# Altium PCB ControlBoard.PcbDoc (part 1 of 2)
Units mil, origin at the board's own origin, x right, y up, seen from the top; angles counter-clockwise.
Board outline 4736.14 x 4742.83 mil, 2 copper layers (Top Layer, Bottom Layer); 196 components, 148 nets, 699 pads, 226 vias.
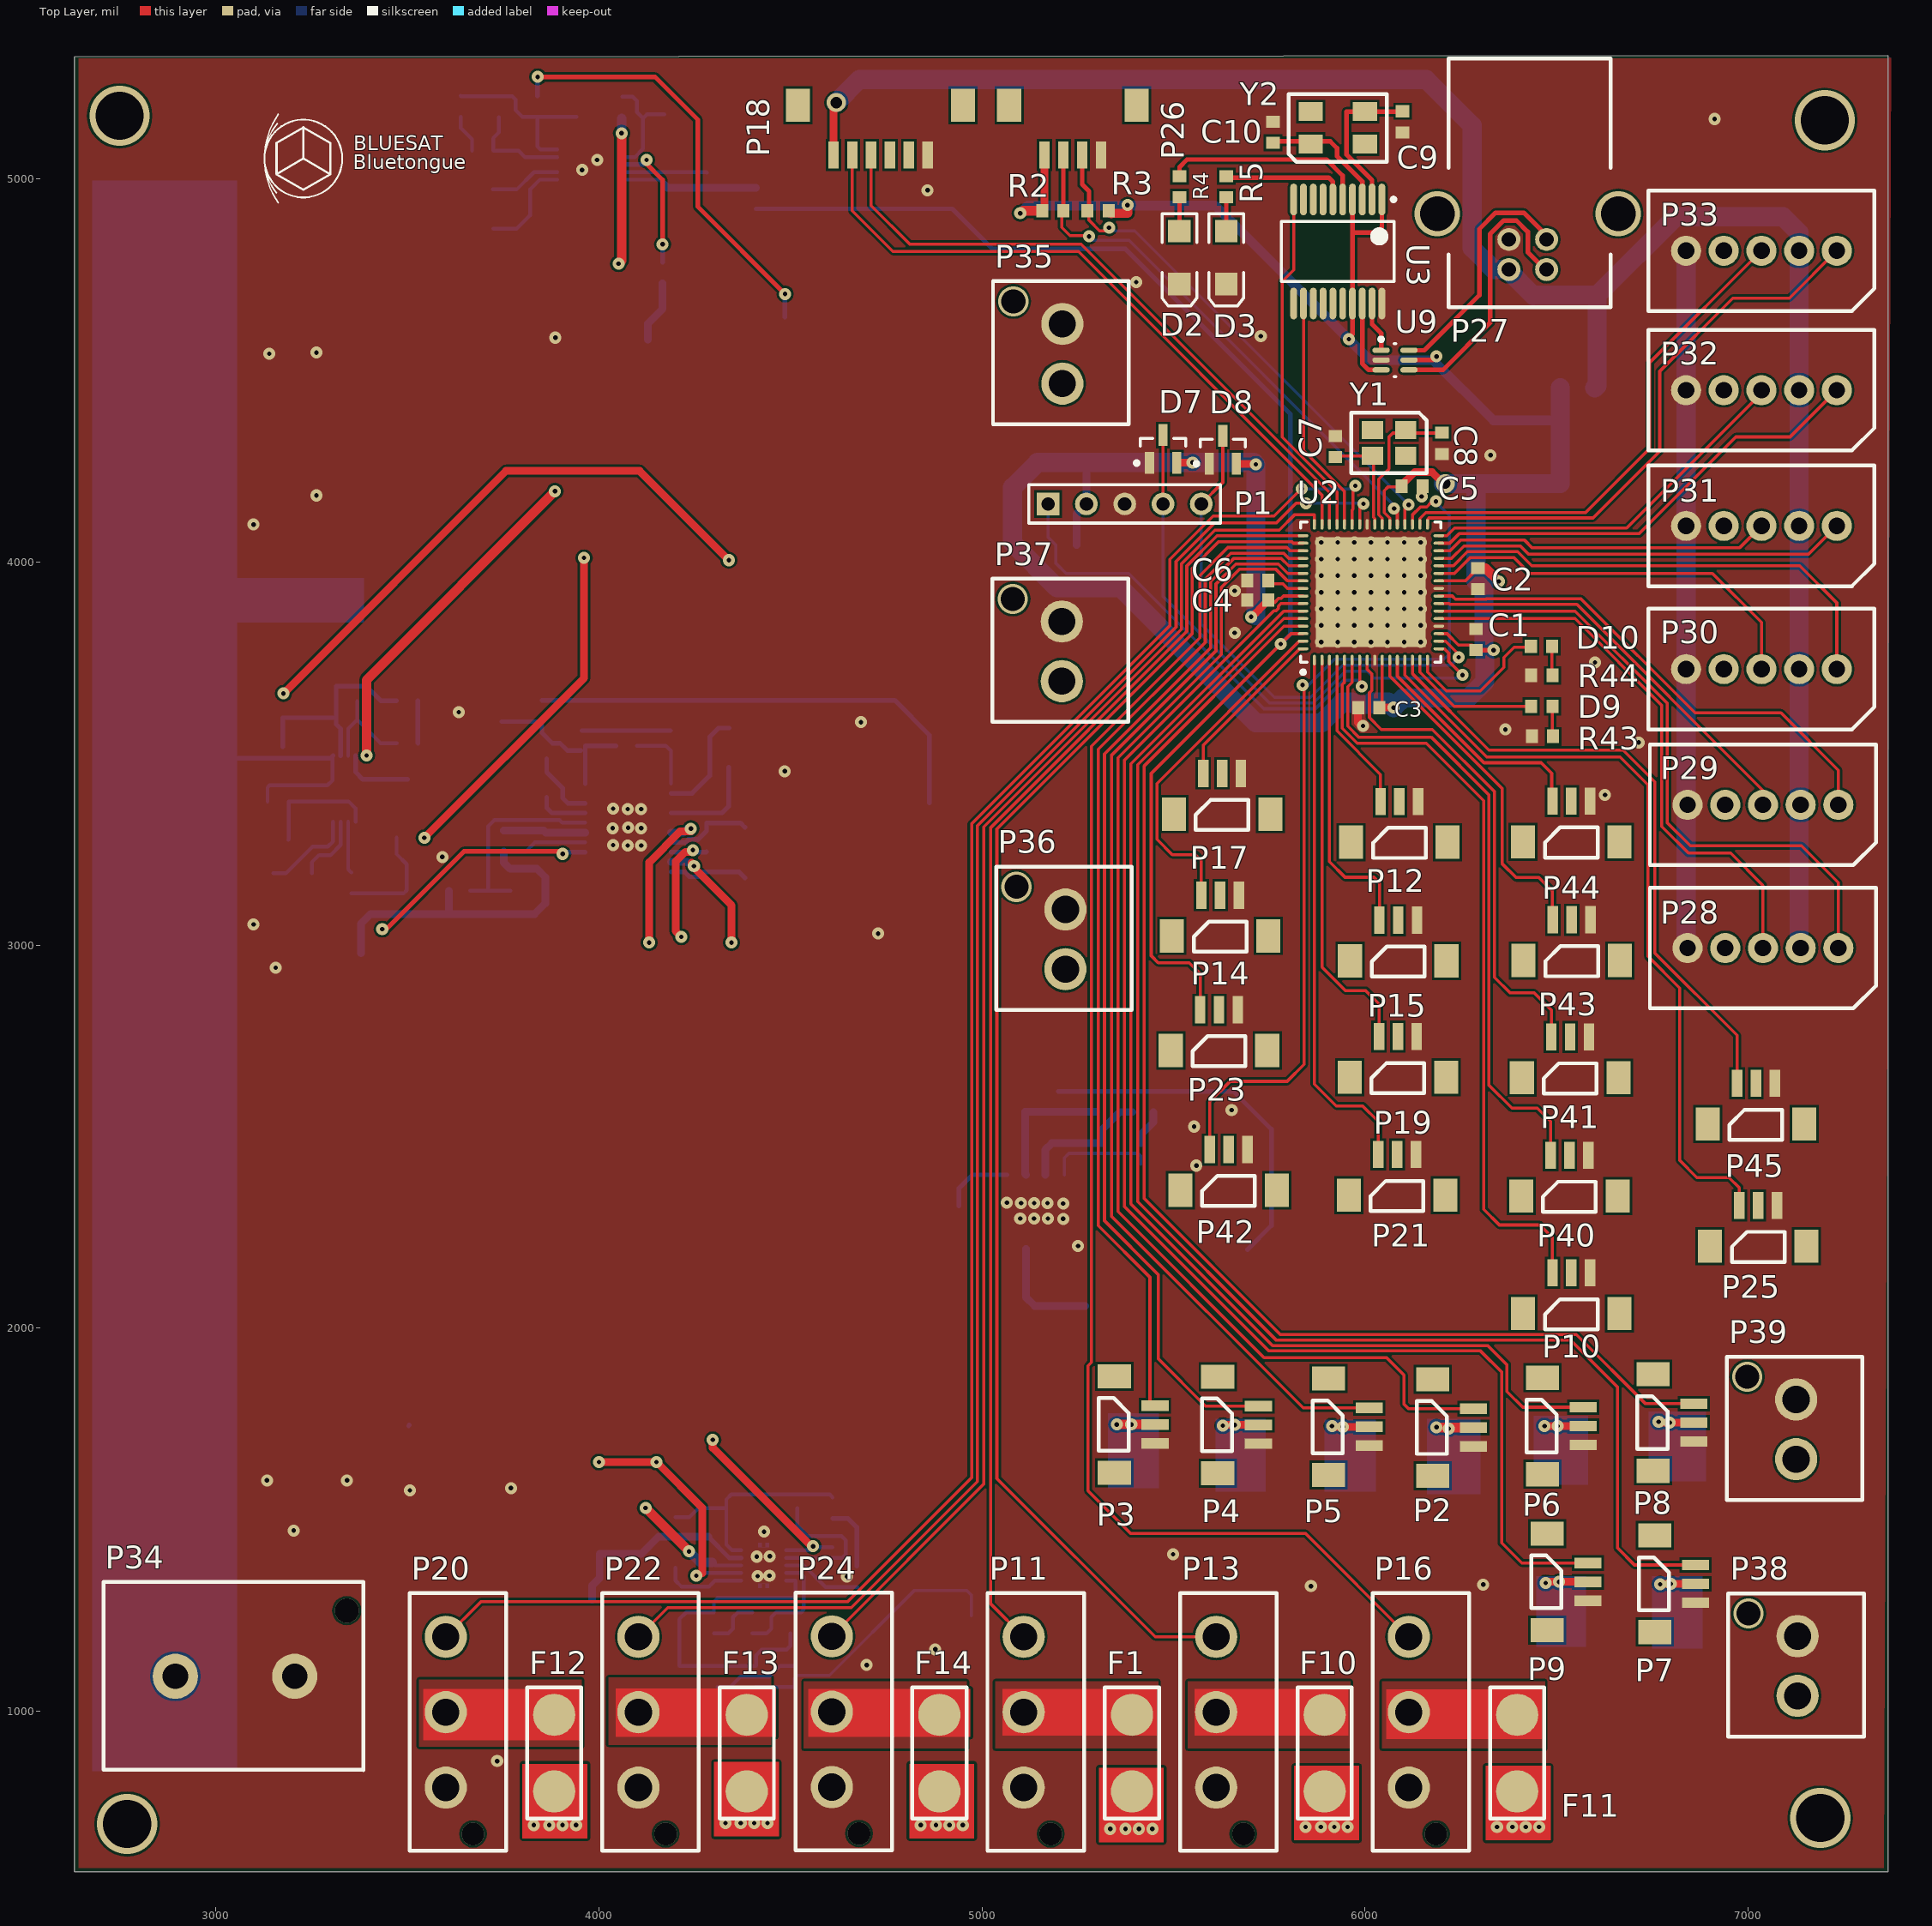
[diagram p0: Top Layer view]
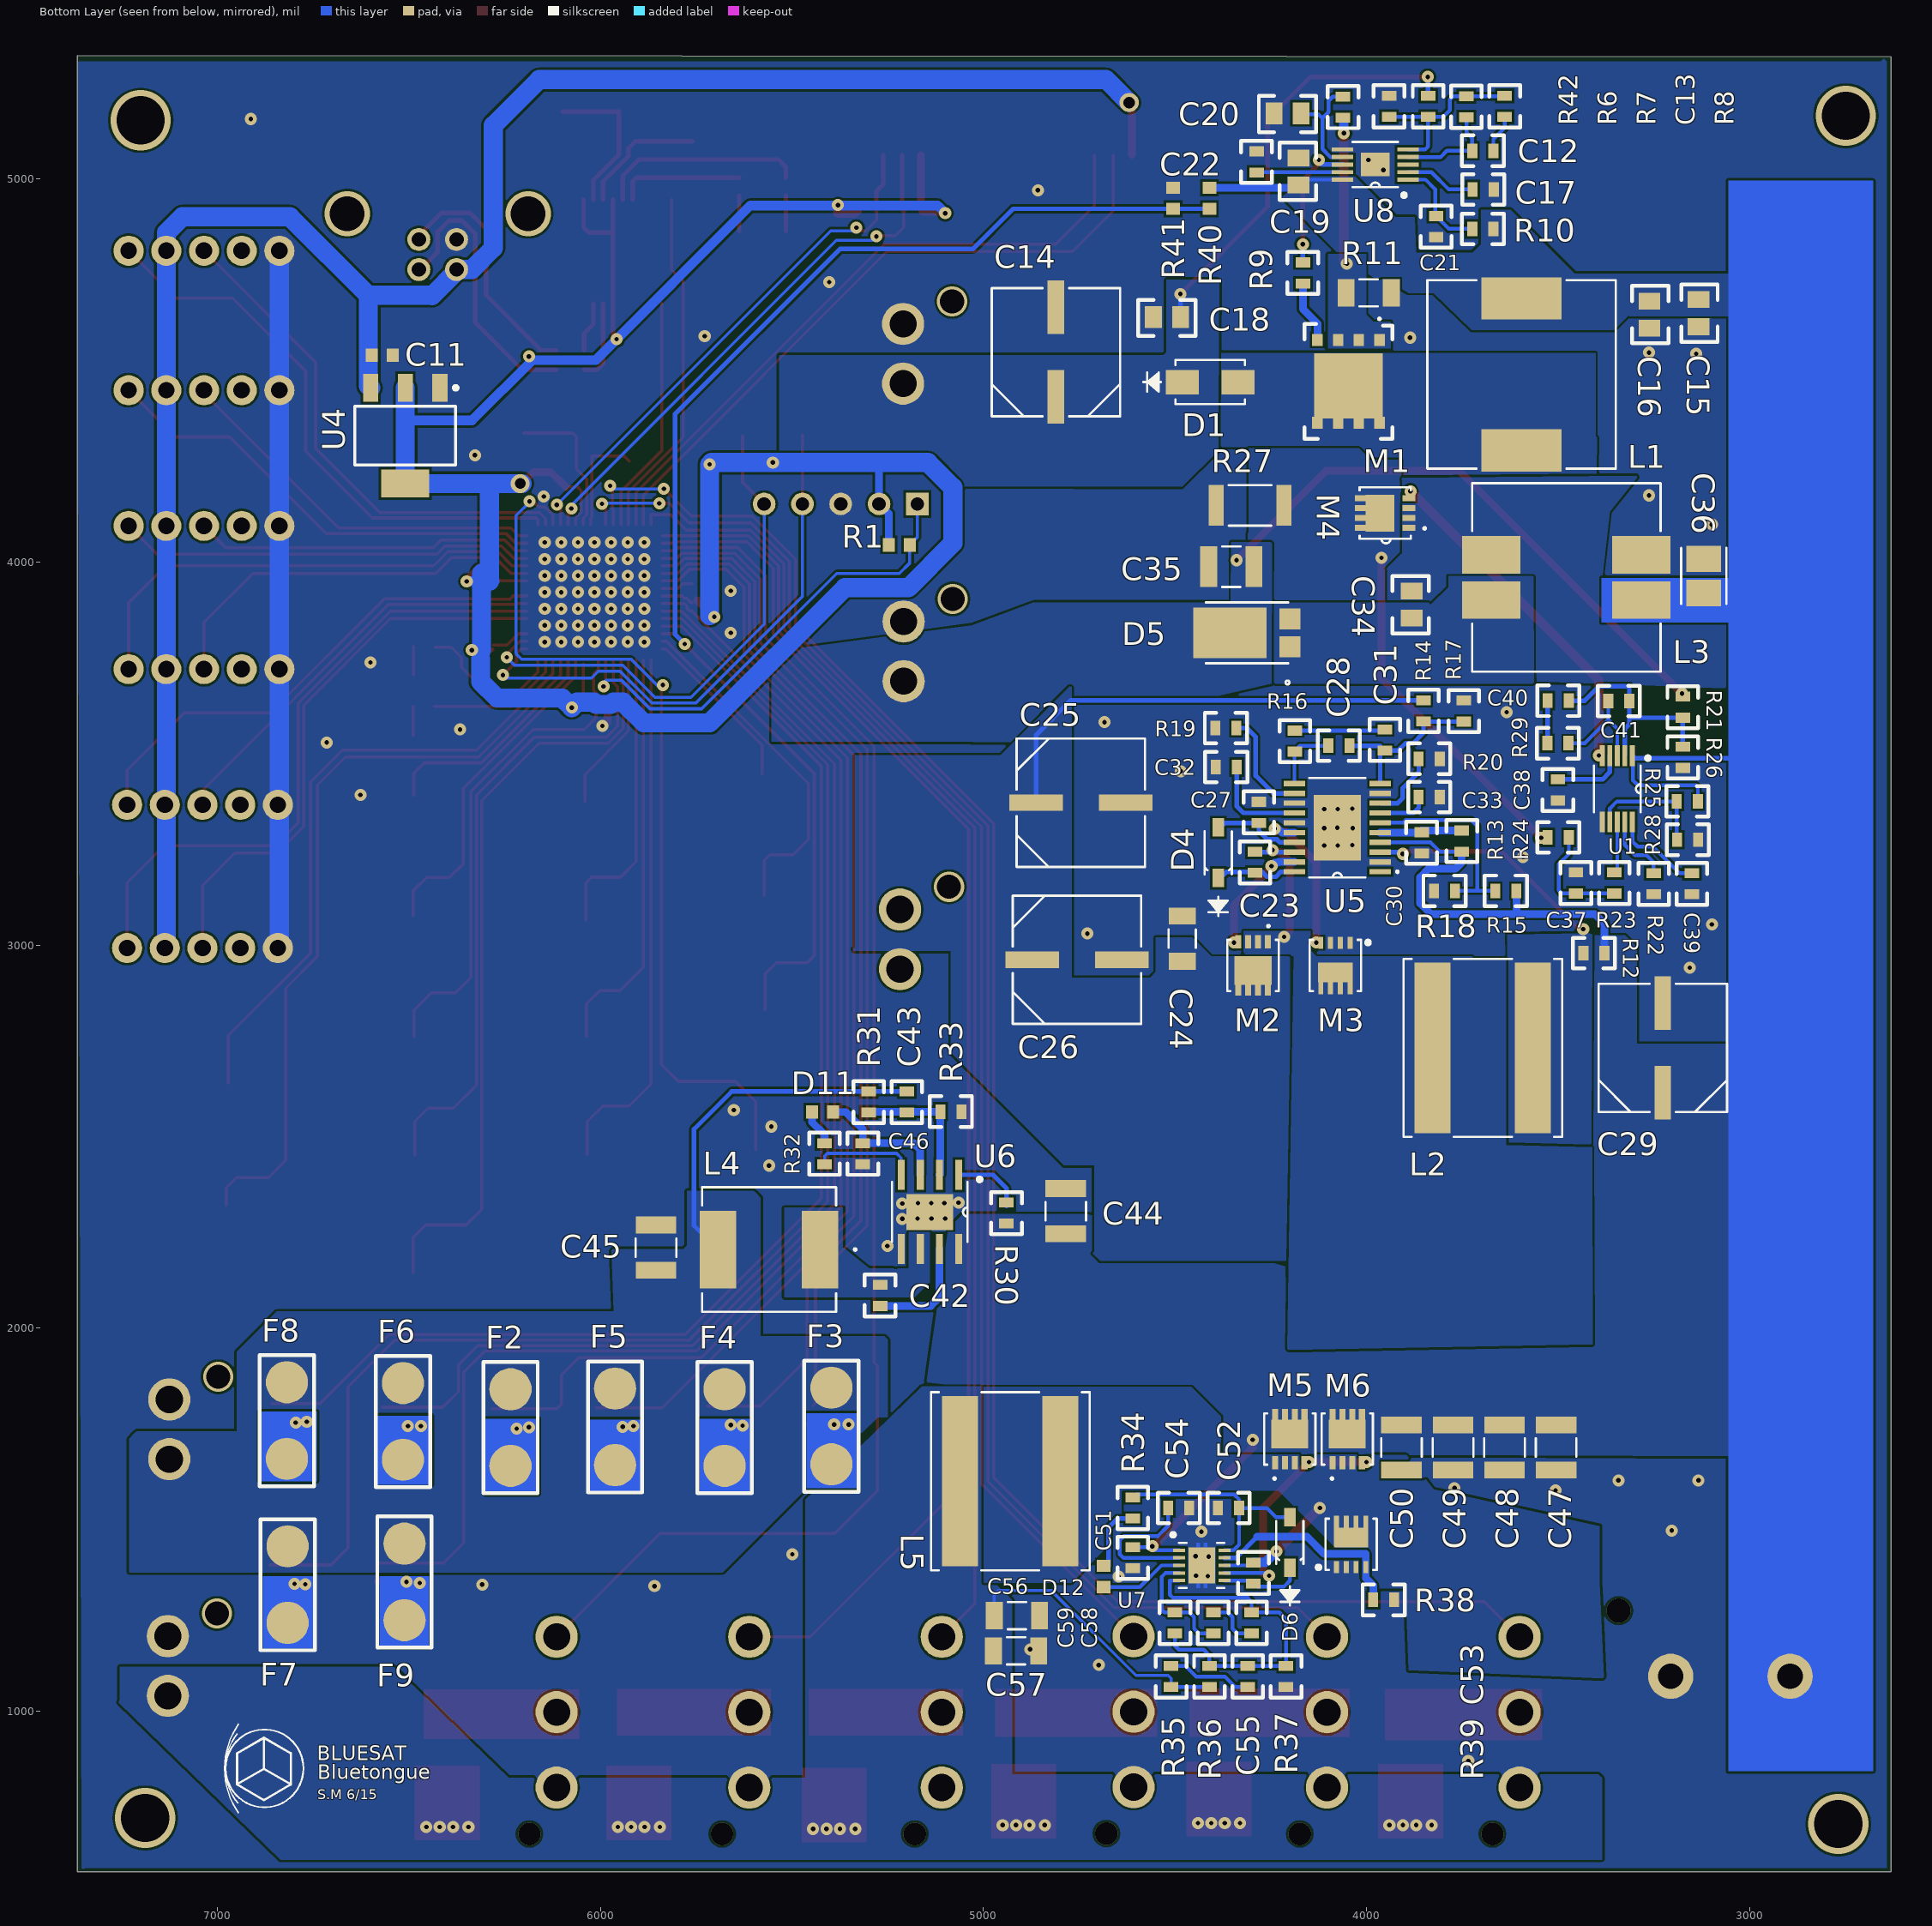
[diagram p1: Bottom Layer view, seen from below]

## Layer stack, top to bottom
Top Layer: signal copper 1.4
Dielectric: core 12.6, FR-4, Dk 4.8
Bottom Layer: signal copper 1.4

## Board outline
2630,580 2630,5318.9 7366.14,5322.83 7366.14,4527.87 7366.14,4520 7366.14,580

## Design rules (kind name [scope] priority, off if disabled: settings)
Clearance [All] p1: gap=6
HoleSize [All] p1: absolutevalues=TRUE maxlimit=100 minlimit=9.84 maxpercent=80.000 minpercent=20.000
MinimumSolderMaskSliver [All] p1: minsoldermaskwidth=3.94
PlaneConnect [All] p1: planeconnectstyle=Direct reliefexpansion=20 reliefentries=4 reliefconductorwidth=10 reliefairgap=10
PolygonConnect [All] p1: connectstyle=Direct reliefconductorwidth=10 reliefentries=4 polygonreliefangle="90 Angle" airgapwidth=10
RoomDefinition Control [InComponentClass('Control')] p1: confinementstyle=ConfineIn formatcopy=TRUE lockcomponents=FALSE outline 3490.51,619.6 3490.51,1322.83 4376.38,1322.83 4376.38,5009.21 4476.22,5009.21 4476.22,5309.21 6117.95,5309.21 6117.95,5329.96 6732.44,5329.96 6732.44,4985.47 7345.71,4985.47 7345.71,3538.62 7349.65,3538.62 7349.65,2819.65 7196.45,2819.65 7196.45,2157.36 6910.4,2157.36 6910.4,1162.55 6902.87,1162.55 6902.87,1143.35 6483.5,1143.35 6483.5,704.09 6287.15,704.09 6287.15,619.6
RoomDefinition Power5V [InComponentClass('Power5V')] p2: confinementstyle=ConfineIn formatcopy=TRUE lockcomponents=FALSE outline 4719,2212.03 4719,2397.97 4990,2397.97 4990,2450.97 5015,2450.97 5015,2620 5145,2620 5145,2660 5355,2660 5355,2597.62 5479.21,2597.62 5479.21,2380.5 5752.97,2380.5 5752.97,2302.97 5921,2302.97 5921,2117.03 5752.97,2117.03 5752.97,2029.5 5325,2029.5 5325,2015 5215,2015 5215,2155.03 4990,2155.03 4990,2212.03
RoomDefinition Power7V4 [InComponentClass('Power7V4')] p3: confinementstyle=ConfineIn formatcopy=TRUE lockcomponents=FALSE outline 3438.85,1594.8 3438.85,1780.74 3970,1780.74 3970,1800.97 4710,1800.97 4710,1845.5 5150,1845.5 5150,1354.5 5007.85,1354.5 5007.85,1108.48 4565,1108.48 4565,1020 4155,1020 4155,1235 3810,1235 3810,1594.8
RoomDefinition Power12V [InComponentClass('Power12V')] p4: confinementstyle=ConfineIn formatcopy=TRUE lockcomponents=FALSE outline 3047,3873.03 3047,4054.97 3194.03,4054.97 3194.03,4219 3761.97,4219 3761.97,4218 3992.97,4218 3992.97,4214 4424.47,4214 4424.47,4054 4445.97,4054 4445.97,3907.5 4463.97,3907.5 4463.97,3667.5 3570,3667.5 3570,3472 3569,3472 3569,3226 3508,3226 3508,3092 3305,3092 3305,3090 3095,3090 3095,3220 3091,3220 3091,3873.03
RoomDefinition Power19V [InComponentClass('Power19V')] p5: confinementstyle=ConfineIn formatcopy=TRUE lockcomponents=FALSE outline 3045.5,2532.53 3045.5,2930.47 3346,2930.47 3346,3101.5 3566,3101.5 3566,3196.5 3696,3196.5 3696,3341.5 3698,3341.5 3698,3680.5 3796,3680.5 3796,3681.5 3906,3681.5 3906,3621.5 4437,3621.5 4437,3552 4944.97,3552 4944.97,3142 4954.97,3142 4954.97,2781 3916,2781 3916,2486 3476,2486 3476,2532.53
RoomDefinition Power24V [InComponentClass('Power24V')] p6: confinementstyle=ConfineIn formatcopy=TRUE lockcomponents=FALSE outline 3068,4560 3068,4740 3336,4740 3336,4755.47 3584,4755.47 3584,5260 3996,5260 3996,5258 4116,5258 4116,5229 4296,5229 4296,5114 4337,5114 4337,4746.97 4991.5,4746.97 4991.5,4349.03 4177,4349.03 4177,4307 3854,4307 3854,4224.53 3336,4224.53 3336,4556 3196,4556 3196,4560
RoomDefinition Power [InComponentClass('Power')] p7: confinementstyle=ConfineIn formatcopy=TRUE lockcomponents=FALSE outline 2691.69,830.67 2691.69,1351.61 5012.56,1351.61 5012.56,4747.28 5396.89,4747.28 5396.89,1940.2 7314.21,1940.2 7314.21,1322.09 7318.15,1322.09 7318.15,918.07 3399.65,918.07 3399.65,830.67
RoutingVias [All] p1: holewidth=11.81 width=23.62 viastyle="Through Hole" minholewidth=11.81 minwidth=31.5 maxholewidth=118.11 maxwidth=118.11
SilkToSilkClearance [All] p1: silktosilkclearance=3.94
SilkToSolderMaskClearance [IsPad] p1: minsilkscreentomaskgap=7.87 clearancetoexposedcopper=TRUE
SolderMaskExpansion [All] p1: expansion=1.97
Width [All] p1: maxlimit=196.85 minlimit=6 preferedwidth=9.84
23 further rules are at their usual default settings.

## Classes and differential pairs
component class Power: P34 P35 P36 P37 P38 P39
component class Power24V: C12 C13 C14 C15 C16 C17 C18 C19 C20 C21 C22 D1 L1 M1 R6 R7 R8 R9 R10 R11 R42 U8
component class Power19V: C23 C24 C25 C26 C27 C28 C29 C30 C31 C32 C33 D4 L2 M2 M3 R12 R13 R14 R15 R16 R17 R18 R19 R20 U5
component class Power12V: C34 C35 C36 C37 C38 C39 C40 C41 D5 L3 M4 R21 R22 R23 R24 R25 R26 R27 R28 R29 U1
component class Power7V4: C47 C48 C49 C50 C51 C52 C53 C54 C55 C56 C57 C58 C59 D6 D12 L5 M5 M6 M7 R34 R35 R36 R37 R38 R39 U7
component class Power5V: C42 C43 C44 C45 C46 D11 L4 R30 R31 R32 R33 U6
component class Control: C1 C2 C3 C4 C5 C6 C7 C8 C9 C10 C11 D2 D3 D7 D8 D9 D10 F1 F2 F3 F4 F5 F6 F7 F8 F9 F10 F11 F12 F13 F14 P1 P2 P3 P4 P5 P6 P7 P8 P9 P10 P11 P12 P13 P14 P15 P16 P17 P18 P19 P20 P21 P22 P23 P24 P25 P26 P27 P28 P29 P30 P31 P32 P33 P40 P41 P42 P43 P44 P45 R1 R2 R3 R4 R5 R40 R41 R43 R44 U2 U3 U4 U9 Y1 Y2

## Components (designator, comment, footprint, x,y, rotation, side; value= is the part's Value field where it differs from the comment)
C1 "100nF" 1608[0603] 6290,3798 r270 top
C2 "100nF" 1608[0603] 6295.28,3956.69 r90 top
C3 "100nF" 1608[0603] 6010,3620 r0 top
C4 "100nF" 1608[0603] 5720.41,3900.76 r0 top
C5 "100nF" 1608[0603] 6123,4198 r180 top
C6 "10uF" 1608[0603] 5720.41,3951.94 r0 top
C7 "18pF" 1608[0603] 5923,4302 r270 top
C8 "18pF" 1608[0603] 6201,4310 r90 top
C9 "8pF" 1608[0603] 6098.43,5149.61 r270 top
C10 "8pF" 1608[0603] 5759.84,5122.05 r90 top
C11 "" 1608[0603] 6570,4540 r0 bottom
C12 "CC0805KRX7R9BB27" 1608 3696,5074 r180 bottom
C13 "CC0805JRNPO9BN10" 1608 3739,5189 r90 bottom
C14 "35SVPF82M" CAPSMT_62_E12 4811,4548 r90 bottom
C15 "GRM21BR61E475MA1" 0805 3133,4650 r270 bottom
C16 "GRM21BR61E475MA1" 0805 3261,4646 r270 bottom
C17 "GRM155R61A683KA0" 1608 3695,4973 r180 bottom
C18 "GMK212B7105KG-T" 0805 4521,4640 r0 bottom
C19 "EMK212B7474KD-T" 0805 4177,5020 r90 bottom
C20 "CC0805JRNPO9BN15" 0805 4206,5172 r0 bottom
C21 "CC0805JRNPO9BN10" 1608 3818,4876 r270 bottom
C22 "C1608X5R1C105K" 1608 4287,5045 r90 bottom
C23 "C0805C224K5RACTU" 1608 4291,3216 r90 bottom
C24 "C3216JB1E476M" 1206 4481,3016.5 r90 bottom
C25 "25SVPF180M" CAPSMT_62_E12 4746,3371.5 r180 bottom
C26 "25SVPF180M" CAPSMT_62_E12 4756,2961.5 r180 bottom
C27 "GRM21BC81E475KA1" 1608 4281,3346.5 r270 bottom
C28 "CL21C431JBANNNC" 1608 4072,3520.5 r0 bottom
C29 "20SVPF390M" CAPSMT_62_E12 3226,2731.5 r90 bottom
C30 "GRM188R71C474KA8" 1608 3856,3267 r270 bottom
C31 "GRM216R71H103KA0" 1608 3952,3535.5 r90 bottom
C32 "TMK212BJ474KD-T" 1608 4366,3464.5 r0 bottom
C33 "GRM155R61A154KE1" 1608 3836,3386.5 r180 bottom
C34 "GRM21BR61E475MA1" 0805 3882,3889 r90 bottom
C35 "GRM32ER61C226KE2" 1210 4353,3988 r0 bottom
C36 "TPSB226K020R0400" 3528-21 3119,3964 r90 bottom
C37 "GRM1555C1E301JA0" 1608 3453,3162 r90 bottom
C38 "GRM155R61C104KA8" 1608 3500,3405 r270 bottom
C39 "GRM155R71C224KA1" 1608 3150,3160 r270 bottom
C40 "CC0805KRX7R9BB56" 1608 3499,3638 r0 bottom
C41 "C0603C0G1E110G" 1608 3341,3637 r0 bottom
C42 "C1005X5R1A104K" 1608 5270,2085 r90 bottom
C43 "GRM1555C1E5R1CA0" 1608 5200,2590 r270 bottom
C44 "GRM32ER61E226KE1" 1210 4785,2305 r90 bottom
C45 "C3216X6S1A476M" 1210 5855,2210 r90 bottom
C46 "GRM155R61A474KE1" 1608 5315,2455 r270 bottom
C47 "GRM32ER61E226KE1" 1210 3504.85,1687.77 r270 bottom
C48 "GRM32ER61E226KE1" 1210 3639.37,1687.77 r270 bottom
C49 "GRM32ER61E226KE1" 1210 3773.88,1687.77 r270 bottom
C50 "GRM32ER61E226KE1" 1210 3908.4,1687.77 r270 bottom
C51 "GRM188R61E105KA1" 1608 4610,1400 r270 bottom
C52 "GRM188R61A225KE3" 1608 4360,1530 r0 bottom
C53 "08053C104KAT2A" 1608 4295,1360 r90 bottom
C54 "GRM033R71C332KA8" 1608 4490,1530 r180 bottom
C55 "GRM155R71H182KA0" 1608 4310,1090 r90 bottom
C56 "C3216X6S1A476M" 1206 4912.91,1248.82 r180 bottom
C57 "C3216X6S1A476M" 1206 4914.88,1156.98 r180 bottom
C58 "CC0805KRX7R9BB15" 1608 4400,1230 r270 bottom
C59 "GRM1555C1H361JA0" 1608 4500,1230 r90 bottom
D1 "B240A-13-F" SMA 4408,4470 r180 bottom
D2 "LED2" 3.2X1.6X1.1 5515.75,4795.28 r270 top
D3 "LED2" 3.2X1.6X1.1 5637.8,4795.28 r270 top
D4 "MBR130T1G" SOD-123 4387,3241 r90 bottom
D5 "PDS760-13" PowerDI5 4312,3815 r90 bottom
D6 "MBR0540T1G" SOD-123 4200,1440 r90 bottom
D7 "BAT54S" SOT90P240X110-3N 5473,4295 r90 top
D8 "BAT54S" SOT90P240X110-3N 5629,4293 r90 top
D9 "LED2" 1608[0603] 6462,3623 r180 top
D10 "LED2" 1608[0603] 6461,3780 r180 top
D11 "LED2" 1608[0603] 5420,2564 r0 bottom
D12 "LED2" 1608[0603] 4686,1351 r90 bottom
F1 "RSTA 2-BULK" 56400001009 5391.77,789.95 r90 top
F2 "RSTA 2-BULK" 56400001009 6235,1640 r90 bottom
F3 "RSTA 2-BULK" 56400001009 5397,1844 r270 bottom
F4 "RSTA 2-BULK" 56400001009 5676,1840 r270 bottom
F5 "RSTA 2-BULK" 56400001009 5962,1842 r270 bottom
F6 "RSTA 2-BULK" 56400001009 6516,1856 r270 bottom
F7 "RSTA 2-BULK" 56400001009 6817,1430 r270 bottom
F8 "RSTA 2-BULK" 56400001009 6818.9,1858.27 r270 bottom
F9 "RSTA 2-BULK" 56400001009 6512,1437 r270 bottom
F10 "RSTA 2-BULK" 56400001009 5894.7,789.95 r90 top
F11 "RSTA 2-BULK" 56400001009 6397.64,789.95 r90 top
F12 "RSTA 2-BULK" 56400001009 3882.96,789.95 r90 top
F13 "RSTA 2-BULK" 56400001009 4385.9,789.95 r90 top
F14 "RSTA 2-BULK" 56400001009 4888.83,789.95 r90 top
L1 "SRR1210-220M" SRR1210 3595,4490 r270 bottom
L2 "XAL1010-682MEB" XAL1010 3696,2731.5 r0 bottom
L3 "DRQ127-3R3-R" DRQ127 3478,3960 r0 bottom
L4 "IHLP3232DZER3R3M" IHLP-3232DZ 5560,2205 r0 bottom
L5 "XAL1010-681MEB" XAL1010 4930,1600 r0 bottom
M1 "CSD17551Q5A" TRANS_NexFET_Q5A 4047,4472 r270 bottom
M2 "CSD16340Q3" TRANS_NexFET_Q3 4296,2946.5 r270 bottom
M3 "BSZ035N03MS G" PG-TSDSON-8 4081,2946.5 r270 bottom
M4 "CSD16340Q3" TRANS_NexFET_Q3 3951,4128 r0 bottom
M5 "CSD16340Q3" TRANS_NexFET_Q3 4200,1710 r90 bottom
M6 "CSD16340Q3" TRANS_NexFET_Q3 4050,1710 r90 bottom
P1 "Header 5" HDR1X5 5172.75,4151.81 r0 top
P2 "DF13-3" DF13-3 6283,1740 r270 top
P3 "DF13-3" DF13-3 5452,1748 r270 top
P4 "DF13-3" DF13-3 5722,1747 r270 top
P5 "DF13-3" DF13-3 6011,1742 r270 top
P6 "DF13-3" DF13-3 6570,1744 r270 top
P7 "DF13-3" DF13-3 6863,1332 r270 top
P8 "DF13-3" DF13-3 6859,1753 r270 top
P9 "DF13-3" DF13-3 6582,1337 r270 top
P10 "DF13-3" DF13-3 6539,2144 r0 top
P11 "DF5A-3" DF5A-3 5108.8,996.8 r270 top
P12 "DF13-3" DF13-3 6090,3375 r0 top
P13 "DF5A-3" DF5A-3 5611.74,996.8 r270 top
P14 "DF13-3" DF13-3 5622,3130 r0 top
P15 "DF13-3" DF13-3 6087,3065 r0 top
P16 "DF5A-3" DF5A-3 6114.67,996.8 r270 top
P17 "DF13-3" DF13-3 5627,3448 r0 top
P18 "DF13-6" DF13-6S-1.25H 4759.84,5062.99 r0 top
P19 "DF13-3" DF13-3 6086,2761 r0 top
P20 "DF5A-3" DF5A-3 3600,996.8 r270 top
P21 "DF13-3" DF13-3 6084,2453 r0 top
P22 "DF5A-3" DF5A-3 4102.94,996.8 r270 top
P23 "DF13-3" DF13-3 5619,2831 r0 top
P24 "DF5A-3" DF5A-3 4608,998 r270 top
P25 "DF13-3" DF13-3 7027,2320 r0 top
P26 "DF13-4" DF13-4S-1.25H 5311.02,5062.99 r0 top
P27 "USB Header" USB-B 6425.2,4803.15 r180 top
P28 "DF1EC-5P" DF1EC-4P 7039.37,2992.13 r180 top
P29 "DF1EC-5P" DF1EC-4P 7039.37,3366.14 r180 top
P30 "DF1EC-5P" DF1EC-4P 7035.43,3720.47 r180 top
P31 "DF1EC-5P" DF1EC-4P 7035.43,4094.49 r180 top
P32 "DF1EC-5P" DF1EC-4P 7035.43,4448.82 r180 top
P33 "DF1EC-5P" DF1EC-4P 7035.43,4812.99 r180 top
P34 "DF22-2" DF22-2 2893.7,1090.55 r0 top
P35 "DF22-2" DF63 5210,4466 r90 top
P36 "DF22-2" DF63 5218,2937 r90 top
P37 "DF22-2" DF63 5208.66,3688.98 r90 top
P38 "DF22-2" DF63 7129.92,1039.37 r90 top
P39 "DF22-2" DF63 7125.98,1657.48 r90 top
P40 "DF13-3" DF13-3 6534,2451 r0 top
P41 "DF13-3" DF13-3 6536,2760 r0 top
P42 "DF13-3" DF13-3 5644,2466 r0 top
P43 "DF13-3" DF13-3 6540,3066 r0 top
P44 "DF13-3" DF13-3 6539,3376 r0 top
P45 "DF13-3" DF13-3 7021,2639 r0 top
R1 "" 1608[0603] 5220,4045 r0 bottom
R2 "" 1608[0603] 5185.04,4917.32 r180 top
R3 "" 1608[0603] 5303.15,4917.32 r0 top
R4 "" 1608[0603] 5515.75,4980.32 r270 top
R5 "" 1608[0603] 5637.8,4980.32 r270 top
R6 "CRCW04021K40FKED" 1608 3941,5190 r90 bottom
R7 "RR1220P-473-D" 1608 3839,5190 r270 bottom
R8 "CRCW040256K2FKED" 1608 3639,5190 r90 bottom
R9 "CRCW040217R8FKED" 1608 4166,4755 r90 bottom
R10 "CRCW0402316KFKED" 1608 3696,4870 r0 bottom
R11 "CSR1206FK25L0" 1206 3994,4703 r0 bottom
R12 "PRL1632-R005-F-T" 1608 3406,2979 r0 bottom
R13 "CRCW08053R01FKEA" 1608 3751,3271.5 r270 bottom
R14 "RR1220P-473-D" 1608 3851,3611.5 r270 bottom
R15 "CRCW040249K9FKED" 1608 3636,3141.5 r180 bottom
R16 "CRCW040239K2FKED" 1608 4187,3532.5 r90 bottom
R17 "CRCW04023K16FKED" 1608 3746,3611 r90 bottom
R18 "CRCW040210K0FKED" 1608 3796,3141.5 r180 bottom
R19 "CRCW040286K6FKED" 1608 4367,3566.5 r180 bottom
R20 "CRCW040219K6FKED" 1608 3836,3486.5 r0 bottom
R21 "CRCW040286K6FKED" 1608 3174,3621 r270 bottom
R22 "CRCW040215K0FKED" 1608 3250,3160 r90 bottom
R23 "CRCW04022K21FKED" 1608 3353,3162 r270 bottom
R24 "CRCW0402100RFKED" 1608 3499,3281 r0 bottom
R25 "CRCW040213K3FKED" 1608 3162,3375 r180 bottom
R26 "CRCW040210K0FKED" 1608 3174,3490 r270 bottom
R27 "CSRN2010FK50L0" 2010 4304,4148 r0 bottom
R28 "CRCW04022K37FKED" 1608 3161,3275 r0 bottom
R29 "CRCW040273K2FKED" 1608 3500,3527 r0 bottom
R30 "CRCW040210K0FKED" 1608 4940,2300 r270 bottom
R31 "CRCW0402365KFKED" 1608 5300,2590 r270 bottom
R32 "CRCW0402100KFKED" 1608 5415,2455 r270 bottom
R33 "CRCW040249K9FKED" 1608 5085,2565 r180 bottom
R34 "CRCW0402100KFKED" 1608 4610,1530 r270 bottom
R35 "CRCW0402261RFKED" 1608 4510,1090 r90 bottom
R36 "CRCW040210K0FKED" 1608 4410,1090 r90 bottom
R37 "CRCW0402887RFKED" 1608 4210,1090 r270 bottom
R38 "CRCW04024K42FKED" 1608 3955,1290 r180 bottom
R39 "CRCW04021K21FKED" 1608 4300,1230 r90 bottom
R40 "" 1608[0603] 4410,4950 r90 bottom
R41 "" 1608[0603] 4505,4950 r270 bottom
R42 "CRCW04021K00FKED" 1608 4061,5188 r90 bottom
R43 "" 1608[0603] 6464,3545 r0 top
R44 "" 1608[0603] 6462,3704 r0 top
U1 "LM5022MM/NOPB" MUB10A 3345,3408 r270 bottom
U2 "dsPIC33EP512MC806" QFN50P900X900X100_HS-65N 6015.75,3921.26 r90 top
U3 "MCP2200" SOP65P780X200-20N 5929.13,4811.02 r270 top
U4 "Reg1117" SOT230P700X180-4N 6510,4330 r270 bottom
U5 "LM5122MH/NOPB" MXA20A 4076,3306.5 r0 bottom
U6 "TPS56528DDAR" R-PDSO-G8 5140,2303 r270 bottom
U7 "TPS40304DRCR" S-PVSON-N10 4430,1380 r180 bottom
U8 "TPS40210DGQR" S-PDSO-G10 3977,5038 r0 bottom
U9 "NUF2221W1" TSOP65P210X110-6N 6078.74,4527.56 r0 top
Y1 "NX5032GC" 7M-30.000MBBK-T 6062.99,4311.02 r180 top
Y2 "NX5032GC" NX5032GC 5929.13,5133.86 r0 top

## Footprints (in the part's own frame and the unit in brackets; to place one, negate y for a bottom-side part, rotate by r counter-clockwise, add the part's x,y. Pads: shape width x height; smd on the part's side, far side on the other; paste and mask are expansions set on the pad)
3.2X1.6X1.1 [mm] "SMT LED; 2 Flat Leads"
  rect 1.5x1.5 smd: 1(-1.75,0) 2(1.75,0)
  silkscreen extent -2.9,-1.15 3.2,1.15
7M-30.000MBBK-T [mm] "CRYSTAL 30MHZ 20PF SMD"
  rect 1.4x1.2 smd: 1(-1.1,-0.85) 2(1.1,-0.85) 3(1.1,0.85) 4(-1.1,0.85)
  silkscreen extent -2.5,-2 2.5,2
0805 [mil]
  rect 44x57 smd: 1(-35.5,0) 2(35.5,0)
  silkscreen extent -75,-45 75,50
1206 [mil]
  rect 44x71 smd: 1(-59,0) 2(59,0)
  silkscreen extent -24,-36 24,36
1210 [mil]
  rect 44x106 smd: 1(-59,0) 2(59,0)
  silkscreen extent -24,-53 24,53
1608 [mil]
  rect 26x38 smd: 1(-27.5,0) 2(27.5,0)
  silkscreen extent -55,-40 55,40
1608[0603] [mm] "Chip Capacitor, Body 1.6x0.8mm, IPC High Density"
  rect 0.8x0.9 smd: 1(-0.7,0) 2(0.7,0)
  body extent -0.87,-0.48 0.87,0.48, height 1.3
2010 [mil]
  rect 40x106 smd: 1(-88.5,0) 2(88.5,0)
  silkscreen extent -55,-53 55,53
3528-21 [mil]
  rect 69x91 smd: 1(-44.5,0) 2(44.5,0)
  silkscreen extent -73,-59 73,59
56400001009 [mm] "FUSE HOLDER RADIAL 250V 6.3A SMD"
  round 2.8 smd: 1(0,0) 2(5.08,0)
  silkscreen extent -1.8,-1.8 6.9,1.8
CAPSMT_62_E12 [mil]
  rect 140x43 smd: 1(-117,0) 2(117,0)
  silkscreen extent -168,-168 168,168
DF1EC-4P [mm]
  round 2 hole 1.1: 1(-5,0) 2(-2.5,0) 3(0,0) 4(2.5,0) 5(5,0)
  silkscreen extent -7.5,-4 7.5,4
DF5A-3 [mm]
  round 2.8 hole 1.8: 1(-5,0) 2(0,0) 3(5,0)
  silkscreen extent -7.9,-2.4 9.2,4
DF13-3 [mm] "Part number: DF13C-3P-1.25V(21)"
  rect 0.7x1.8 smd: 1(-1.25,0) 2(0,0) 3(1.25,0)
  rect 1.6x2.2 smd: NC(-3.2,-2.7) NC(3.2,-2.7)
  silkscreen extent -1.75,-3.75 1.75,-1.75
DF13-4S-1.25H [mm] "Hirose DF13 horizontal SMD 4 pin"
  rect 0.7x1.8 smd: 1(-3.75,0) 2(-2.5,0) 3(-1.25,0) 4(0,0)
  rect 1.6x2.2 smd: NC(-6.1,3.3) NC(2.35,3.3)
  body extent -6.7,-0.5 2.95,6, height 3.58
DF13-6S-1.25H [mm] "Hirose DF13 Horisontal SMD 6 pin"
  rect 0.7x1.8 smd: 1(-3.75,0) 2(-2.5,0) 3(-1.25,0) 4(0,0) 5(1.25,0) 6(2.5,0)
  rect 1.6x2.2 smd: NC(-6.1,3.3) NC(4.85,3.3)
  body extent -6.7,-0.5 5.45,6, height 3.58
DF22-2 [mm] "CONN HEADER 2POS 7.92MM PCB TIN"
  round 3 hole 1.7: 1(0,0) 2(7.92,0)
  silkscreen extent -4.75,-6.22 12.47,6.25
DF63 [mm]
  round 2.8 hole 1.8: 1(0,0) 2(3.96,0)
  silkscreen extent -2.7,-4.4 6.8,4.6
DRQ127 [mil]
  rect 152x98 smd: 1(-196,59) 2(-196,-59) 3(196,-59) 4(196,59)
  silkscreen extent -246,-246 246,246
HDR1X5 [mm] "Connector; Header; 5 Position"
  rect 1.5x1.5 hole 0.9: 1(0,0)
  round 1.5 hole 0.9: 2(2.54,0) 3(5.08,0) 4(7.62,0) 5(10.16,0)
  silkscreen extent -1.27,-1.27 11.43,1.27
IHLP-3232DZ [mil]
  rect 95x203 smd: 1(-133.5,0) 2(133.5,0)
  silkscreen extent -228,-162 175,162
MUB10A [mil]
  rect 54x13 smd: 1(-86.5,39.37) 2(-86.5,19.68) 3(-86.5,0) 4(-86.5,-19.68) 5(-86.5,-39.37) 6(86.5,-39.37) 7(86.5,-19.68) 8(86.5,0) 9(86.5,19.68) 10(86.5,39.37)
  silkscreen extent -85,-61 61,85
MXA20A [mil]
  rect 56x14 smd: 1(-112,115.16) 2(-112,89.57) 3(-112,63.98) 4(-112,38.39) 5(-112,12.8) 6(-112,-12.8) 7(-112,-38.39) 8(-112,-63.98) 9(-112,-89.57) 10(-112,-115.16) 11(112,-115.16) 12(112,-89.57) 13(112,-63.98) 14(112,-38.39) 15(112,-12.8) 16(112,12.8) 17(112,38.39) 18(112,63.98) 19(112,89.57) 20(112,115.16)
  rect 124x171 smd: 21(0,0)
  silkscreen extent -160,-130 74,130
NX5032GC [mm] "4-SMD Crystal"
  rect 1.6x1.25 smd: 1(-1.8,-1.075) 2(1.8,-1.075) 3(1.8,1.075) 4(-1.8,1.075)
  silkscreen extent -3.25,-2.25 3.25,2.25
PG-TSDSON-8 [mil]
  rect 31x13 smd paste-6.5: 1(-59.5,38.39) 2(-59.5,12.8) 3(-59.5,-12.8) 4(-59.5,-38.39) 5(59.5,-38.39) 6(59.5,-12.8) 7(59.5,12.8) 8(59.5,38.39)
  rect 52x90 smd paste-26 mask+1: 9(18,0)
  Top Layer region: -75,0 -75,0 -75,0 -75,0
  silkscreen extent -67,-67 67,90
PowerDI5 [mil]
  rect 55x55 smd: 1(-36.22,-112.5) 2(36.22,-112.5)
  rect 132x191 smd: 3(0,44.5)
  silkscreen extent -134,-111 80,108
QFN50P900X900X100_HS-65N [mm] "QFN, 64-Leads, Body 9.00x9.00mm, Pitch 0.50mm, Thermal Pad 7.28x7.28mm, IPC Medium Density"
  oval 0.7x0.2 smd: 1(-4.5,3.75) 2(-4.5,3.25) 3(-4.5,2.75) 4(-4.5,2.25) 5(-4.5,1.75) 6(-4.5,1.25) 7(-4.5,0.75) 8(-4.5,0.25) 9(-4.5,-0.25) 10(-4.5,-0.75) 11(-4.5,-1.25) 12(-4.5,-1.75) 13(-4.5,-2.25) 14(-4.5,-2.75) 15(-4.5,-3.25) 16(-4.5,-3.75) 33(4.5,-3.75) 34(4.5,-3.25) 35(4.5,-2.75) 36(4.5,-2.25) 37(4.5,-1.75) 38(4.5,-1.25) 39(4.5,-0.75) 40(4.5,-0.25) 41(4.5,0.25) 42(4.5,0.75) 43(4.5,1.25) 44(4.5,1.75) 45(4.5,2.25) 46(4.5,2.75) 47(4.5,3.25) 48(4.5,3.75)
  oval 0.2x0.7 smd: 17(-3.75,-4.5) 18(-3.25,-4.5) 19(-2.75,-4.5) 20(-2.25,-4.5) 21(-1.75,-4.5) 22(-1.25,-4.5) 23(-0.75,-4.5) 24(-0.25,-4.5) 25(0.25,-4.5) 26(0.75,-4.5) 27(1.25,-4.5) 28(1.75,-4.5) 29(2.25,-4.5) 30(2.75,-4.5) 31(3.25,-4.5) 32(3.75,-4.5) 49(3.75,4.5) 50(3.25,4.5) 51(2.75,4.5) 52(2.25,4.5) 53(1.75,4.5) 54(1.25,4.5) 55(0.75,4.5) 56(0.25,4.5) 57(-0.25,4.5) 58(-0.75,4.5) 59(-1.25,4.5) 60(-1.75,4.5) 61(-2.25,4.5) 62(-2.75,4.5) 63(-3.25,4.5) 64(-3.75,4.5)
  rect 7.28x7.28 smd: 65(0,0)
  silkscreen extent -5.42,-4.65 4.65,4.65, body extent -4.5,-4.5 4.5,4.5, height 1
R-PDSO-G8 [mil]
  rect 78x18.14 smd: 1(-97,75) 2(-97,25) 3(-97,-25) 4(-97,-75) 5(97,-75) 6(97,-25) 7(97,25) 8(97,75)
  rect 94x122 smd paste-60.5: 9(0,0)
  silkscreen extent -90,-99 79,135
S-PDSO-G10 [mm]
  rect 1.411x0.27 smd: 1(-2.175,1) 2(-2.175,0.5) 3(-2.175,0) 4(-2.175,-0.5) 5(-2.175,-1) 6(2.175,-1) 7(2.175,-0.5) 8(2.175,0) 9(2.175,0.5) 10(2.175,1)
  rect 1.88x1.57 smd paste-0.927: 11(0,0)
  silkscreen extent -2.03,-1.5 1.5,2.16
S-PVSON-N10 [mm]
  rect 0.8x0.23 smd: 1(-1.5,1) 2(-1.5,0.5) 3(-1.5,0) 4(-1.5,-0.5) 5(-1.5,-1) 6(1.5,-1) 7(1.5,-0.5) 8(1.5,0) 9(1.5,0.5) 10(1.5,1)
  rect 1.75x2.4 smd paste-1.187: 11(0,0)
  Top Layer region: -0.365,-1.2 0.365,-1.2 0.365,-1.5 0.135,-1.5 0.135,-1.2 -0.135,-1.2 -0.135,-1.5 -0.365,-1.5
  Top Layer region: -0.365,1.2 0.365,1.2 0.365,1.5 0.135,1.5 0.135,1.2 -0.135,1.2 -0.135,1.5 -0.365,1.5
  silkscreen extent -2.03,-1.5 1.5,2.16
SMA [mil]
  rect 86x64 smd: 1(-73,0) 2(73,0)
  silkscreen extent -174,-58 90,58
SOD-123 [mil]
  rect 48x30 smd: 1(-66,0) 2(66,0)
  silkscreen extent -165,-36 56,36
SOP65P780X200-20N [mm] "SOP, 20-Leads, Body 7.20x5.30mm, Pitch 0.65mm, IPC Medium Density"
  oval 2.1x0.45 smd: 1(-3.45,2.925) 2(-3.45,2.275) 3(-3.45,1.625) 4(-3.45,0.975) 5(-3.45,0.325) 6(-3.45,-0.325) 7(-3.45,-0.975) 8(-3.45,-1.625) 9(-3.45,-2.275) 10(-3.45,-2.925) 11(3.45,-2.925) 12(3.45,-2.275) 13(3.45,-1.625) 14(3.45,-0.975) 15(3.45,-0.325) 16(3.45,0.325) 17(3.45,0.975) 18(3.45,1.625) 19(3.45,2.275) 20(3.45,2.925)
  silkscreen extent -3.57,-3.75 2,3.83, body extent -2.8,-3.75 2.8,3.75, height 2
SOT90P240X110-3N [mm] "SOT23, 3-Leads, Body 2.90x2.40mm, Pitch 0.90mm, IPC Medium Density"
  rect 1.45x0.6 smd: 1(-0.925,0.9) 2(-0.925,-0.9) 3(0.925,0)
  silkscreen extent -1.05,-1.5 0.7,1.87, body extent -0.7,-1.5 0.7,1.5, height 1.1
SOT230P700X180-4N [mm] "SOT223, 4-Leads, Body 6.50x7.00mm (avg), Pitch 2.30mm, IPC Medium Density"
  rect 1.85x1 smd: 1(-3.175,2.3) 2(-3.175,0) 3(-3.175,-2.3)
  rect 1.85x3.2 smd: 4(3.175,0)
  silkscreen extent -3.3,-3.35 1.95,3.47, body extent -1.85,-3.35 1.85,3.35, height 1.8
SRR1210 [mil]
  rect 110x209 smd: 1(-198.5,0) 2(198.5,0)
  silkscreen extent -246,-246 246,246
TRANS_NexFET_Q3 [mil]
  rect 34x16 smd: 1(-62,38.39) 2(-62,12.8) 3(-62,-12.8) 4(-62,-38.39) 5(62,-38.39) 6(62,-12.8) 7(62,12.8) 8(62,38.39)
  rect 74.8x96.46 smd: 9(13.46,0)
  Top Layer region: 67,0 67,0 67,0 67,0
  silkscreen extent -106,-67 67,67
TRANS_NexFET_Q5A [mm]
  rect 0.8x0.7 smd paste-0.387: 1(-2.752,2.055) 2(-2.752,0.685) 3(-2.752,-0.685) 4(-2.752,-2.055) 5(2.752,-2.055) 6(2.752,-0.685) 7(2.752,0.685) 8(2.752,2.055)
  rect 4.3x4.56 smd paste-2.267 mask+0.025: 9(0.3,0)
  silkscreen extent -4.22,-2.92 3.81,2.92
TSOP65P210X110-6N [mm] "TSOP, 6-Leads, Body 2.00x1.25mm, Pitch 0.65mm, IPC Medium Density"
  oval 1.15x0.35 smd: 1(-0.925,0.65) 2(-0.925,0) 3(-0.925,-0.65) 4(0.925,-0.65) 5(0.925,0) 6(0.925,0.65)
  silkscreen extent -1.05,-1.1 0.05,1.5, body extent -0.7,-1.1 0.7,1.1, height 1.1
USB-B [mm] "2411 02"
  round 1.524 hole 0.95: 1(1.25,1) 2(-1.25,1) 3(-1.25,-1) 4(1.25,-1)
  silkscreen extent -5.5,-13 5.25,3.5
XAL1010 [mil]
  rect 94x445 smd: 1(-131,0) 2(131,0)
  silkscreen extent -207,-232 207,232

## Part data
C1 C2 C3 C4 C5 C6 C7 C8 C9 C10 C11: library part Capacitor
C12 C13 C14 C15 C16 C17 C18 C19 C20 C21 C22 C23 C24 C25 C26 C27 C28 C29 C30 C31 C32 C33 C34 C35 C36 C37 C38 C39 C40 C41 C42 C43 C44 C45 C46 C47 C48 C49 C50 C51 C52 C54 C55 C58 C59 D1 D4 D5 L1 L2 L3 L4 L5 M1 M2 M3 M4 M5 M6 R6 R7 R8 R9 R10 R11 R12 R13 R14 R15 R16 R17 R18 R19 R20 R21 R22 R23 R24 R25 R26 R27 R28 R29 R30 R31 R32 R33 U1 U5 U6 U8: "Imported"
D2 D3 D9 D10 D11 D12: "Typical RED, GREEN, YELLOW, AMBER GaAs LED"
F1 F2 F3 F4 F5 F6 F7 F8 F9 F10 F11 F12 F13 F14: "FUSE 2A 250/277V RADIAL"
P1: "Header, 5-Pin"
P34 P35 P36 P37 P38 P39: "CONN HEADER 2POS 7.92MM PCB TIN"
R1 R2 R3 R4 R5 R40 R41 R43 R44: library part Resistor
R42: "Riflt"

## Free pads (board coordinates)
  rect 13x31 smd far side paste-6.5: 1(4078.39,1375.5) 2(4052.8,1375.5) 3(4027.2,1375.5) 4(4001.61,1375.5) 5(4001.61,1494.5) 6(4027.2,1494.5) 7(4052.8,1494.5) 8(4078.39,1494.5)
  rect 90x52 smd far side paste-26 mask+1: 9(4040,1453)

## Via types
v1: diameter 31.5, hole 11.81, Top Layer to Bottom Layer, 205 vias
v2: diameter 59.06, hole 59.06, Top Layer to Bottom Layer, 6 vias
v3: diameter 78.74, hole 62.99, Top Layer to Bottom Layer, 5 vias
v4: diameter 157.48, hole 125.98, Top Layer to Bottom Layer, 4 vias
v5: diameter 118.11, hole 90.55, Top Layer to Bottom Layer, 2 vias
v6: diameter 32, hole 12, Top Layer to Bottom Layer, 1 vias
v7: diameter 50, hole 30, Top Layer to Bottom Layer, 1 vias
v8: diameter 50, hole 28, Top Layer to Bottom Layer, 1 vias
v9: diameter 62.99, hole 62.99, Top Layer to Bottom Layer, 1 vias

## Nets (pads, with @x,y where several pads share a name; then routed paths per layer and width w, separated by ;. In a path a pad name is that pad's centre, name@x,y a point inside that pad or via, vN(x,y) a via of type N, cw(c..) or ccw(c..) an arc to the next point about the centre after c; other vN are vias at no path point)
3V3: C1.2 C2.2 C3.2 C4.2 C5.2 D7.2 D8.2 P1.2 P26.1 R1.2 R2.2 R3.2 U2.10 U2.19 U2.26 U2.38 U2.57 U3.1 U3.4 U3.17 U4.2 U4.4 U9.5 | length 7613.6
  Top Layer w8: C4.2@5760.12,3893.7 5763.15,3893.7 5775.18,3905.73 5781.73,3905.73 5787.42,3911.42 U2.57@5838.58,3911.42 ; C3.2@6037.56,3620 6045.28,3627.72 U2.10@6045.28,3734.36 ; U2.38@6064.96,4098.43 6064.96,4114.63 6050.25,4129.33 6050.25,4186.25 6060,4196 C5.2@6091,4196 ; U2.19@6192.91,3812.99 6214.57,3812.99 6244.09,3783.46 C1.2@6280,3783.46 ; U2.26@6192.91,3950.79 6261.81,3950.79 C2.2@6287.4,3976.38
  Top Layer w12: v1(5958,4582) 5958,4585.48 5967.52,4595 U3.17@5967.52,4675.2 5967.52,4860 ; U3.4@5967.52,4946.85 5967.52,4860 ; U3.1@6044.29,4946.85 6044.29,4874.29 6030,4860 5967.52,4860 ; U9.5@6115.16,4527.56 6177.56,4527.56 v1(6187,4537) ; C1.2@6283.46,3771.65 6285.12,3770 v1(6336,3770)
  Top Layer w20: R2.2@5157.48,4917.32 5163.39,4923.23 P26.1@5163.39,5062.99 ; D7.2@5509.85,4260 v1(5550,4260) ; D8.2@5664.43,4256.58 5713.42,4256.58 v1(5715,4255) ; v1(5703,3857) v1@5704,3856 ; v1@5711.1,3863.9 5714.25,3867.05 5715.23,3867.05 5724.6,3876.42 5724.6,3877.39 C4.2@5747.97,3900.76 ; C3.2@6037.56,3620 v1(6075,3620) ; C5.2@6091,4196 6130,4235 6175,4235 v8@6200,4210
  Top Layer w25: v1(5100,4911) 5107.32,4917.32 R2.2@5157.48,4917.32 ; R3.2@5330.71,4917.32 5338.03,4910 5380,4911 v1(5380,4932.17) ; C2.2@6295.28,3984.25 6314.77,3984.25 v1(6349.51,3949.51)
  Bottom Layer w20: R1.2@5247.56,4045 5247.56,4126.62 P1.2@5272.75,4151.81 5272.75,4257.25 5270,4260
  Bottom Layer w25: v1(5100,4911) 5120,4931 5609,4931 6012.44,4527.56 6177.56,4527.56 6335.12,4370 6510,4370 ; 6275.98,3950 v1@6335,3950 ; 6290.49,3949.51 6311,3970.02 ; 6311,3770 v1(6336,3770)
  Bottom Layer w50: v1@5710,4260 v1(5550,4260) 5270,4260 5145,4260 5080,4195 5080,4049 5196,3933 5362,3933 5715,3580 5887,3580 5941,3634 5966.89,3634 5972.64,3628.25 6011.36,3628.25 6017.11,3634 6061,3634 v1(6075,3620) 6100,3645 6270,3645 6313,3688 6313,3747 ; v1@5715,3860 v1(5715,4255) ; v8@6205,4205 v8(6210,4205) 6290,4205 ; 6290,3950 6290,4205 ; 6311,3770 6311,3970.02 ; U4.2@6510,4455 6510,4370 U4.4@6510,4205 6290,4205
5V: C11.2 P18.1 P27.1 P28.2 P29.2 P30.2 P31.2 P32.2 P33.2 U4.3 | length 5315.3
  Top Layer w20: P18.1@4612.2,5062.99 4612.2,5192.2 v7(4620,5200)
  Bottom Layer w50: v7(4620,5200) 4680,5260 6160,5260 6280,5140 6280,4820 6336.22,4763.78 P27.1@6372.05,4763.78 ; P27.1@6375.98,4763.78 P27.1@6372.05,4763.78 ; U4.3@6600.55,4455 6606.3,4460.75 6606.3,4696.85 ; P28.2@7133.86,2996.06 P30.2@7133.86,3720.47 P31.2@7133.86,4094.49 P32.2@7133.86,4448.82 7133.86,4860.14 7092.43,4901.57 6811.02,4901.57 6606.3,4696.85 ; P27.1@6372.05,4763.78 6440,4695.83 6440,4696.85 6606.3,4696.85
5V-HC: C43.1 C45.1 F2.2 F3.1 F4.1 F5.1 F6.1 F7.1 F8.1 F9.1 L4.2 P39.1 R31.1 | length 936.7
  Bottom Layer w12: C43.1@5200,2617.5 R31.1@5300,2617.5 5657.5,2617.5 5756,2519 5756,2267.5 L4.2@5693.5,2205
7V4: C56.1 C57.1 F1.1 F10.1 F11.1 F12.1 F13.1 F14.1 L5.2 P38.1 R35.1 R36.1 | length 738.9
  Bottom Layer w8: R35.1@4510,1062.5 4510,1085 4518,1093 4602,1093 4824,1315 4960,1315 4971.91,1303.09 C56.1@4971.91,1248.82
  Bottom Layer w10: R36.1@4410,1062.5 R35.1@4510,1062.5
  other v1: 5335,692 5375,692 5410,692 5445,692 5845,697 5885,697 5920,697 5955,697 6345,697 6385,697 6420,697 6455,697 3830,702 3870,702 3905,702 3940,702 4840,702 4880,702 4915,702 4950,702 4330,707 4370,707 4405,707 4440,707
12V: C35.1 D5.3 P37.1 R21.1 | length 1519.1
  Top Layer w20: v1(3176,3657) 3757,4238 4106,4238 v1@4335.5,4008.5
  Bottom Layer w50: P37.1@5191.75,3672.07 P37.1@5208.66,3688.98
  other v1: 4339,4005
19V: C24.1 C25.1 C26.1 M2.5 M2.6 M2.7 M2.8 M2.9 P36.1 R14.1 | length 1226.2
  Bottom Layer w12: R14.1@3851,3639 4772,3639 4863,3548 C25.1@4863,3371.5
24V: C14.1 C18.1 D1.1 P35.1 R7.1 | length 1121.8
  Top Layer w12: v1(3840,5267) 4146,5267 4258,5155 4258,4928 v1(4486,4700)
  Bottom Layer w12: R7.1@3839,5217.5 v1@3839,5266 ; C18.1@4485.5,4640 v1@4485.5,4699.5
ENC_A0: P28.3 U2.21 | length 1483.7
  Top Layer w8: U2.21@6192.91,3852.36 6548.64,3852.36 6775,3626 6775,3310 6845,3240 6955,3240 7039.37,3155.63 P28.3@7039.37,2992.13
ENC_A1: P29.3 U2.23 | length 1086.1
  Top Layer w8: U2.23@6192.91,3891.73 6219.65,3891.73 6222,3889.39 6553.61,3889.39 7039.37,3403.63 P29.3@7039.37,3366.14
ENC_A2: P30.3 U2.27 | length 1051.8
  Top Layer w8: U2.27@6192.91,3970.47 6192.98,3970.54 6233.54,3970.54 6274.81,4011.81 6389.19,4011.81 6430.46,3970.54 6907.42,3970.54 7035.43,3842.52 P30.3@7035.43,3720.47
ENC_A3: P31.3 U2.30 | length 886.8
  Top Layer w8: U2.30@6192.91,4029.53 6222.53,4029.53 6251,4058 6415.99,4058 6436.99,4037 6977.95,4037 P31.3@7035.43,4094.49
ENC_A4: P32.3 U2.32 | length 1004.5
  Top Layer w8: U2.32@6192.91,4068.9 6213.9,4068.9 6234,4089 6683.49,4089 7035.43,4440.95 P32.3@7035.43,4448.82
ENC_A5: P33.3 U2.34 | length 1328.2
  Top Layer w8: U2.34@6143.7,4098.43 6143.7,4113.7 6159.25,4129.25 6576.25,4129.25 6744,4297 6744,4521.56 P33.3@7035.43,4812.99
ENC_B0: P28.1 U2.22 | length 1690.5
  Top Layer w8: U2.22@6192.91,3872.05 6548.95,3872.05 6789,3632 6789,3320 6850,3259 7140,3259 7236.22,3162.78 P28.1@7236.22,2992.13
ENC_B1: P29.1 U2.24 | length 1322.5
  Top Layer w8: U2.24@6192.91,3911.42 6228.12,3911.42 6236.15,3903.39 6317.13,3903.39 6317.46,3903.72 6564.77,3903.72 6862.19,3606.3 7086.61,3606.3 7236.22,3456.69 P29.1@7236.22,3366.14
ENC_B2: P30.1 U2.28 | length 1283.1
  Top Layer w8: U2.28@6192.91,3990.16 6192.98,3990.22 6231.22,3990.22 6268,4027 6399,4027 6435.78,3990.22 7135.76,3990.22 7232.28,3893.7 P30.1@7232.28,3720.47
ENC_B3: P31.1 U2.29 | length 1091.8
  Top Layer w8: U2.29@6192.91,4009.84 6226.42,4009.84 6258.57,4042 6406,4042 6427,4021 7158.8,4021 P31.1@7232.28,4094.49
ENC_B4: P32.1 U2.31 | length 1204.9
  Top Layer w8: U2.31@6192.91,4049.21 6221.21,4049.21 6246,4074 6715.73,4074 6968.5,4326.77 7110.24,4326.77 P32.1@7232.28,4448.82
ENC_B5: P33.1 U2.33 | length 1494.7
  Top Layer w8: U2.33@6163.39,4098.43 6163.39,4111.39 6167.25,4115.25 6595.55,4115.25 6769.81,4289.52 6769.81,4498.16 6960.63,4688.98 7108.27,4688.98 P33.1@7232.28,4812.99
GND: C1.1 C2.1 C3.1 C4.1 C5.1 C6.1 C7.1 C8.1 C9.2 C10.2 C11.1 C14.2 C15.2 C16.2 C17.2 C18.2 C19.2 C20.2 C21.2 C22.2 C24.2 C25.2 C26.2 C27.1 C29.2 C30.2 C32.2 C33.2 C35.2 C36.2 C37.2 C38.2 C39.2 C44.2 C45.2 C46.2 C47.2 C48.2 C49.2 C50.2 C51.2 C52.2 C54.2 C56.2 C57.2 D2.2 D3.2 D7.1 D8.1 L3.2 M3.1 M3.2 M3.3 P1.3 P2.3 P3.3 P4.3 P5.3 P6.3 P7.3 P8.3 P9.3 P10.3 P11.3 P12.3 P13.3 P14.3 P15.3 P16.3 P17.3 P18.6 P19.3 P20.3 P21.3 P22.3 P23.3 P24.3 P25.3 P26.4 P27.4 P28.5 P29.5 P30.5 P31.5 P32.5 P33.5 P34.2 P35.2 P36.2 P37.2 P38.2 P39.2 P40.3 P41.3 P42.3 P43.3 P44.3 P45.3 pad.1 pad.2 pad.3 R6.2 R11.1 R17.2 R18.1 R19.1 R20.1 R22.1 R26.2 R27.2 R28.1 R33.2 R37.2 R38.2 R41.1 R43.1 R44.1 U1.6 U2.9 U2.20 U2.25 U2.41 U2.65 U3.20 U4.1 U5.2 U5.9 U5.13 U5.15 U5.21 U6.5 U6.9 U7.11 U8.6 U8.11 U9.2 | length 1872.8
  Top Layer w20: C3.1@5982.44,3620 5982,3619.56 5982,3581 5991,3572 v1(5995,3572)
  Bottom Layer w50: P28.5@6838.58,2996.06 P30.5@6838.58,3720.47 P31.5@6838.58,4094.49 P32.5@6838.58,4448.82 P33.5@6838.58,4812.99
  other v1: 3734,869 4699,1120 4878,1161 5859,1326 6309,1330 4647,1351 4414,1352 4445,1353 4412,1403 4446,1404 5499,1409 4431,1468 3203,1471 3506,1576 3770,1582 3133,1602 3342,1602 5251,2214 5212,2285 5100,2286 5136,2286 5172,2286 5212,2325 5102,2326 5136.5,2326 5171,2326 5065,2327 5560,2424 5554,2526 5652,2569 3156,2941 4729,3030 3098,3054 3591,3230 4075,3260 4110,3260 4037,3261 4036,3305 4110,3305 4076,3306.5 4075,3355 4110,3355 4037,3356 6627,3392 4485,3454 6715,3529 6367,3563 4684,3582 3634,3608 6601,3738 5885.83,3791.34 5929.13,3791.34 5972.44,3791.34 6015.75,3791.34 6059.06,3791.34 6102.36,3791.34 6145.67,3791.34 5660,3815 5885.83,3834.65 5929.13,3834.65 5972.44,3834.65 6015.75,3834.65 6059.06,3834.65 6102.36,3834.65 6145.67,3834.65 5885.83,3877.95 5929.13,3877.95 5972.44,3877.95 6015.75,3877.95 6059.06,3877.95 6102.36,3877.95 6145.67,3877.95 5885.83,3921.26 5929.13,3921.26 5972.44,3921.26 6015.75,3921.26 6059.06,3921.26 6102.36,3921.26 6145.67,3921.26 5660,3925 5885.83,3964.57 5929.13,3964.57 5972.44,3964.57 6015.75,3964.57 6059.06,3964.57 6102.36,3964.57 6145.67,3964.57 5885.83,4007.87 5929.13,4007.87 5972.44,4007.87 6015.75,4007.87 6059.06,4007.87 6102.36,4007.87 6145.67,4007.87 5885.83,4051.18 5929.13,4051.18 5972.44,4051.18 6015.75,4051.18 6059.06,4051.18 6102.36,4051.18 6145.67,4051.18 3098,4098 6148,4171 3262,4174 6328,4279 3139,4544 3262,4547 3886,4586 5728,4590 5403,4731 4858,4971 3956,5024 3995,5050 6913,5157
M\C\L\R\: P1.1 R1.1 U2.7 | length 1231.2
  Top Layer w8: v1@5986.22,3675 U2.7@5986.22,3744.09
  Bottom Layer w8: P1.1@5172.75,4151.81 5172.75,4064.69 R1.1@5192.44,4045 5192.44,3997.56 5220,3970 5383,3970 5736,3617 5870.8,3617 5944.8,3691 5985,3691 5992,3684 v1(5992,3675)
NetC6_2: C6.2 U2.56 | length 83.4
  Top Layer w8: C6.2@5760.12,3942.91 5786.09,3942.91 5797.9,3931.1 U2.56@5838.58,3931.1
NetC7_2: C7.2 U2.40 Y1.3 | length 282.2
  Top Layer w8: C7.2@5925.48,4263.78 5938.7,4277 6022.25,4277 6022.25,4116.75 6025.59,4113.41 U2.40@6025.59,4098.43